# Altium PCB Inverter_Breakout.PcbDoc
Units mil, origin at the board's own origin, x right, y up, seen from the top; angles counter-clockwise.
Board outline 2198.03 x 1423.03 mil, 2 copper layers (Top Layer, Bottom Layer); 11 components, 11 nets, 32 pads, 65 vias.
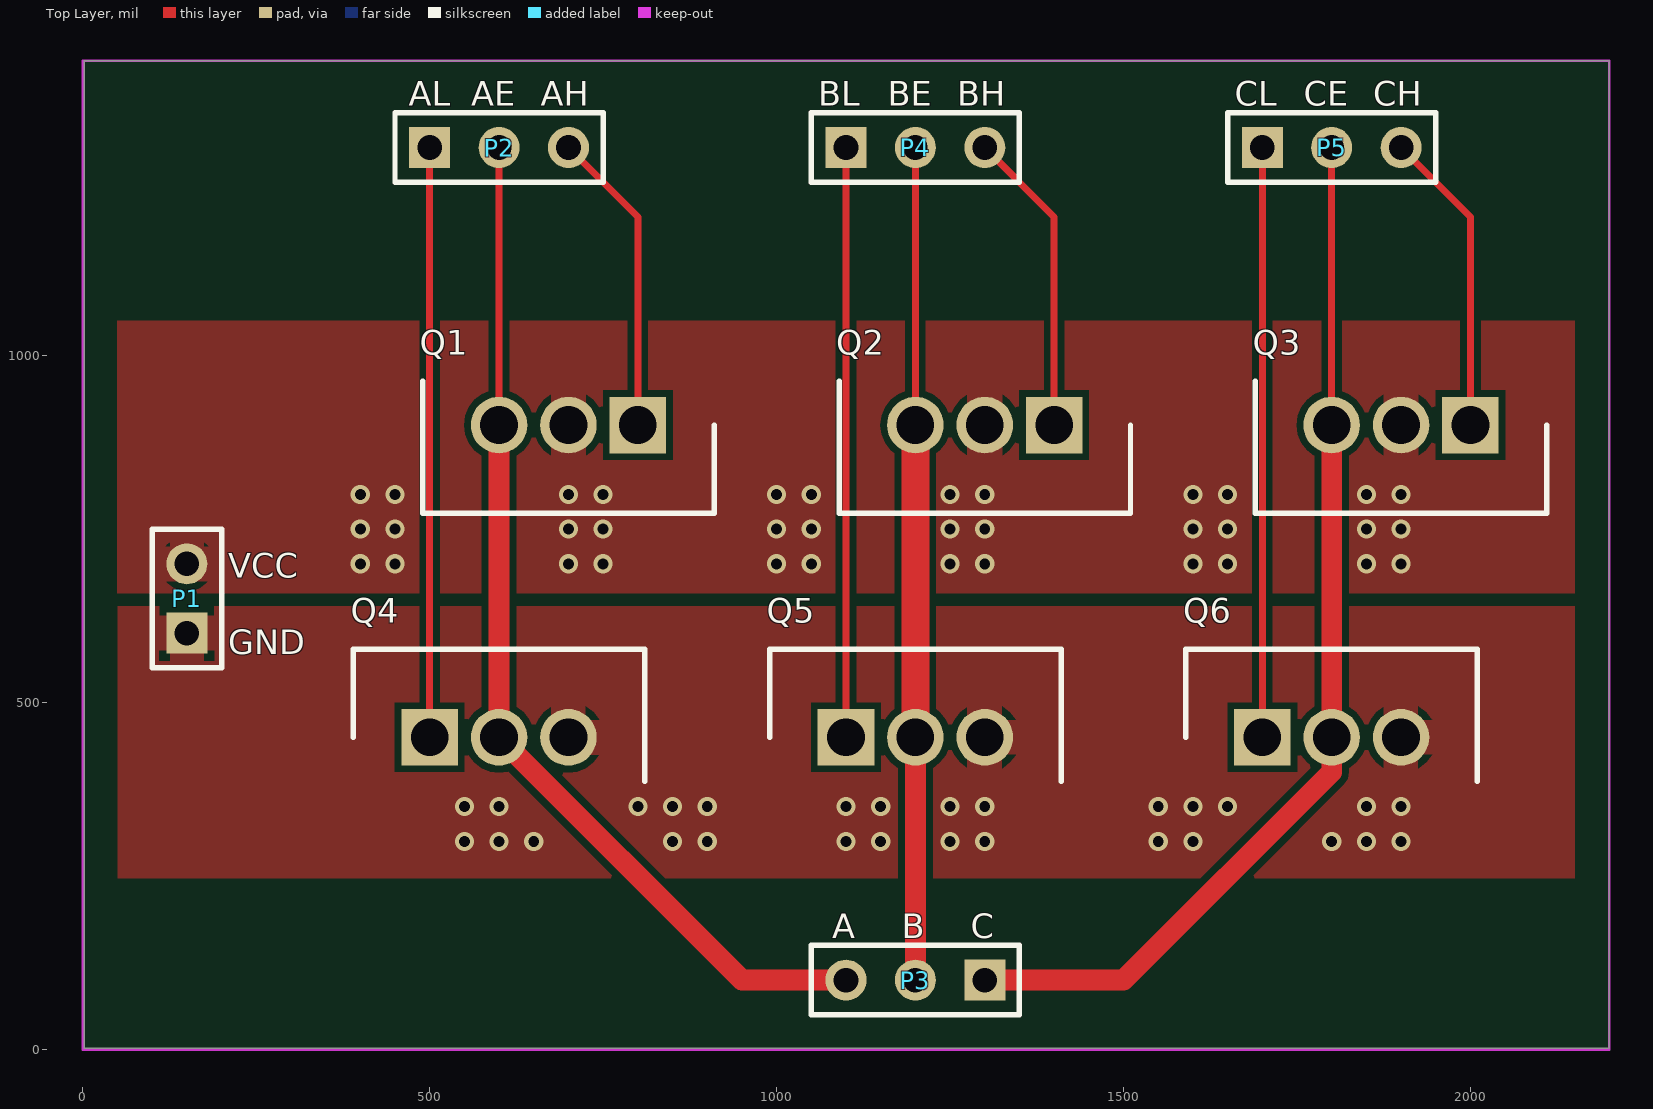
[diagram p0: Top Layer view]
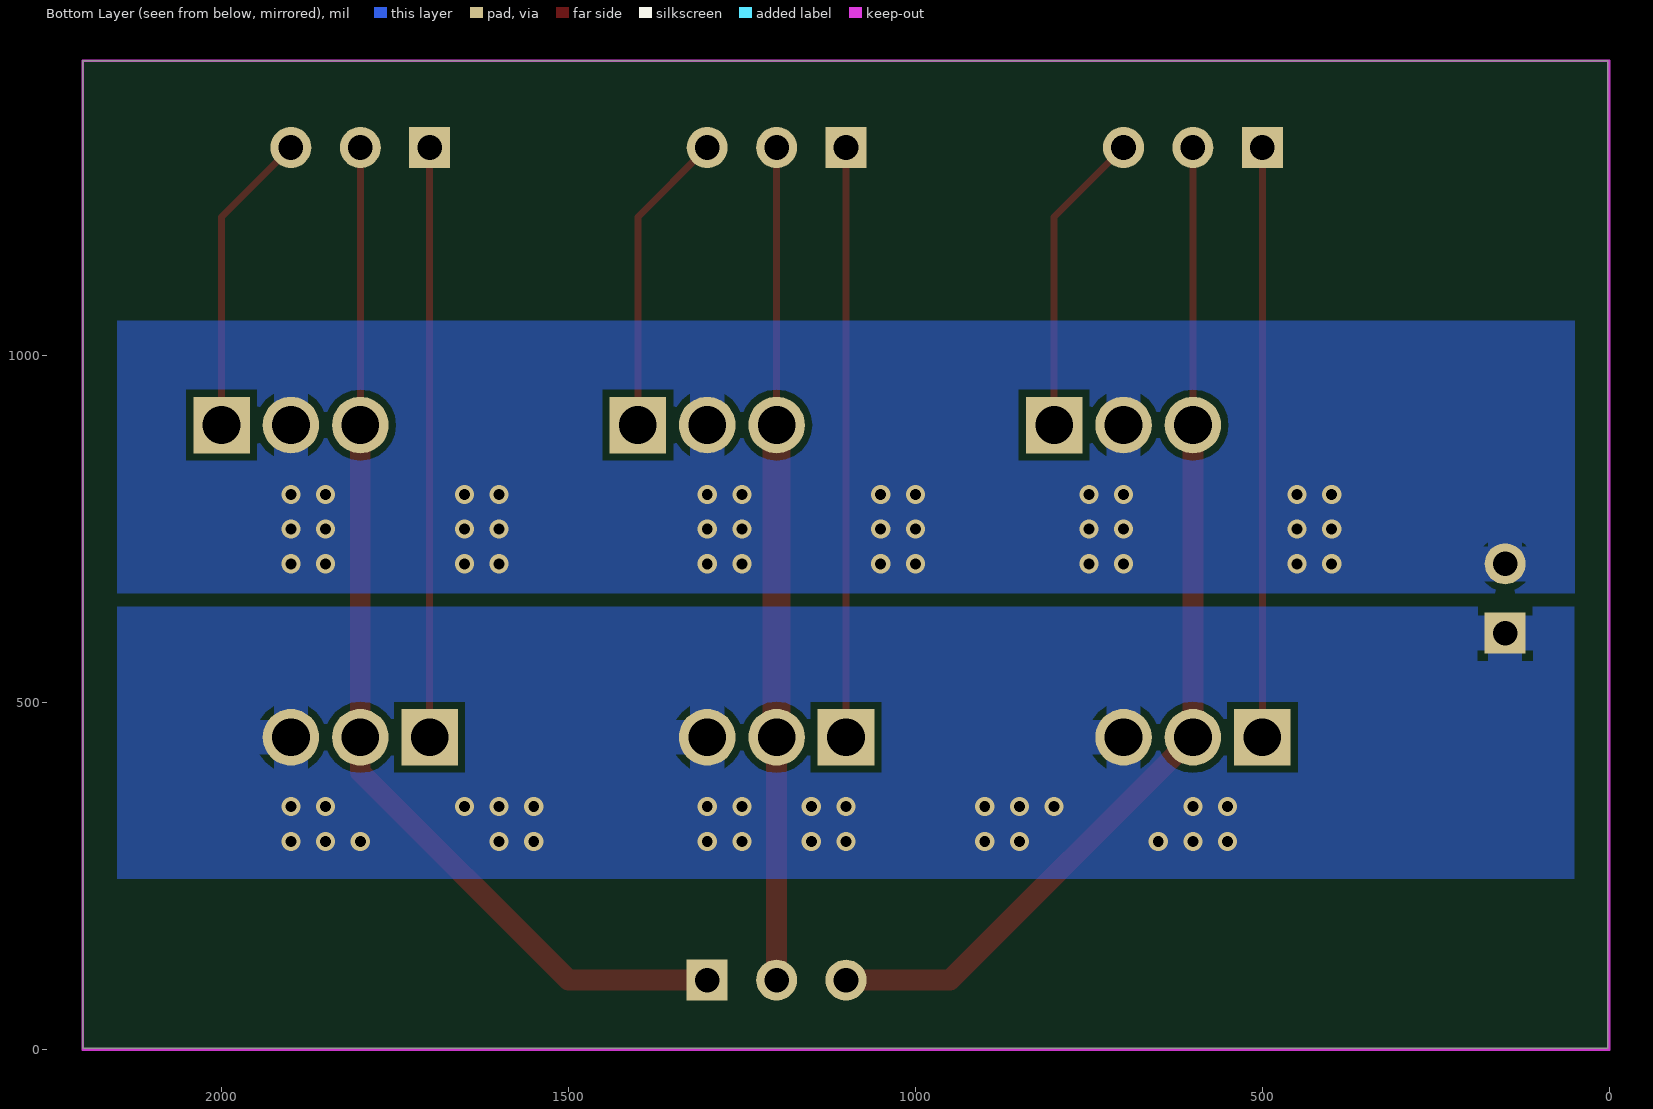
[diagram p1: Bottom Layer view, seen from below]
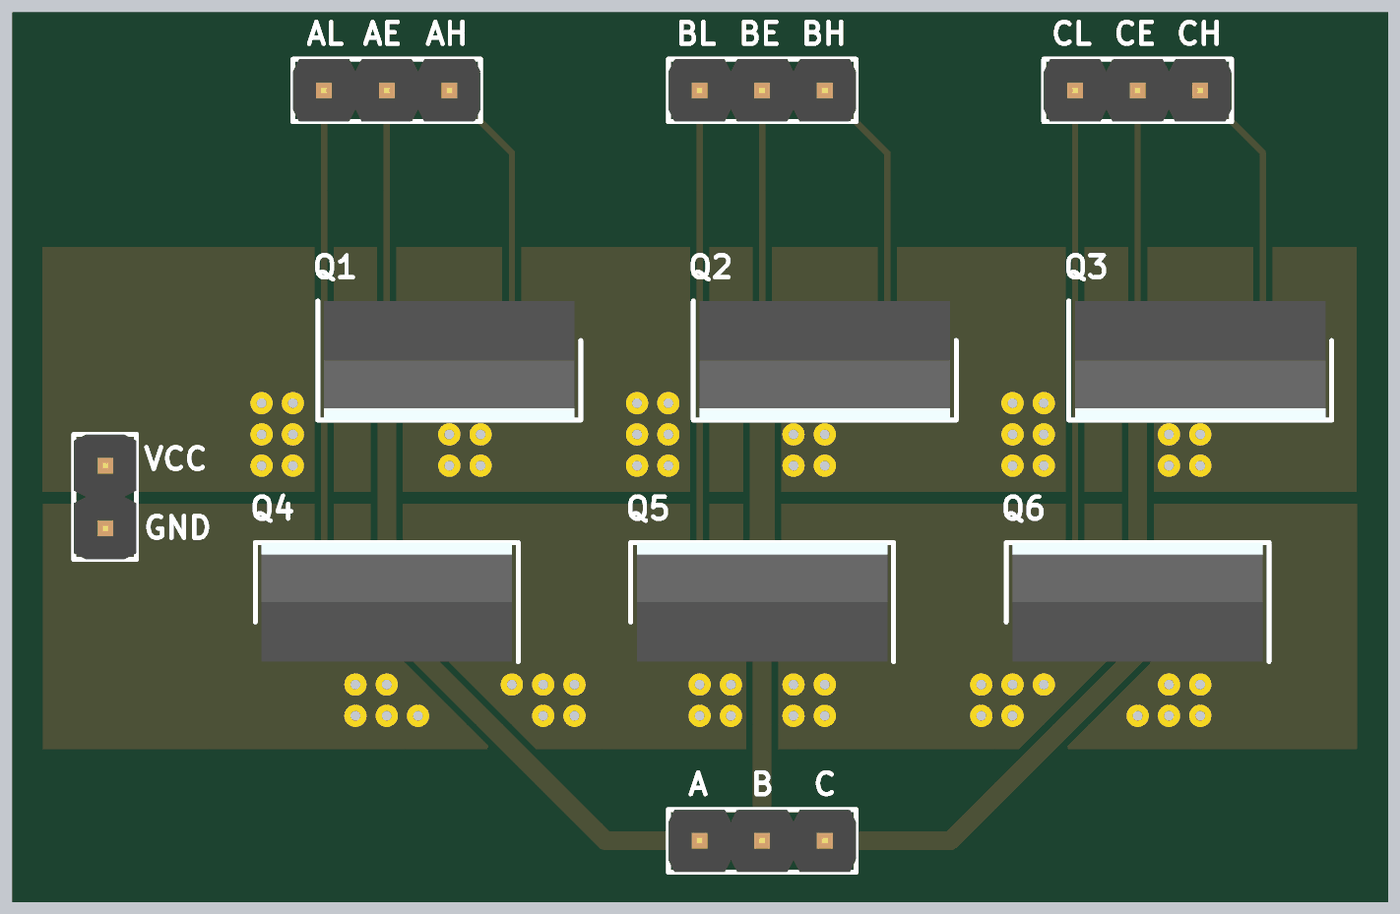
[diagram p2: 3D render of the assembled board from above, using the file's embedded part models]

## Layer stack, top to bottom
Top Solder: solder mask 0.4, Solder Resist, Dk 3.5
Top Layer: signal copper 1.4
Dielectric 1: dielectric 12.6, FR-4, Dk 4.8
Bottom Layer: signal copper 1.4
Bottom Solder: solder mask 0.4, Solder Resist, Dk 3.5

## Board outline
1.97,1.97 2200,1.97 2200,1425 1.97,1425

## Design rules (kind name [scope] priority, off if disabled: settings)
Clearance [All] p1: gap=10 ignorepadtopadclearanceinfootprint=FALSE except(0: Arc-Hole Track-Hole SMDPad-Hole THPad-Hole Via-Hole Fill-Hole Poly-Hole Region-Hole Text-Hole)
PolygonConnect [All] p1: connectstyle=Relief reliefconductorwidth=50 reliefentries=4 polygonreliefangle="90 Angle" airgapwidth=10
RoutingVias [All] p1: holewidth=236.22 width=236.22 viastyle="Through Hole" minholewidth=27.17 minwidth=35 maxholewidth=236.22 maxwidth=236.22
SolderMaskExpansion [All] p1: expansion=4 istentingtop=FALSE
Width [All] p1: maxlimit=50 minlimit=10 preferedwidth=10 minimp=50.000000 maximp=50.000000 favimp=50.000000
30 further rules are at their usual default settings.

## Components (designator, comment, footprint, x,y, rotation, side; value= is the part's Value field where it differs from the comment)
P1 "1x2 Header" HDR1X2 150,600 r90 top
P2 "1x3 Header" HDR1X3 500,1300 r0 top
P3 "1x3 Header" HDR1X3 1300,100 r180 top
P4 "1x3 Header" HDR1X3 1100,1300 r0 top
P5 "1x3 Header" HDR1X3 1700,1300 r0 top
Q1 "IRF2807STRLPBF" TO2520AB 800,900 r180 top
Q2 "IRF2807STRLPBF" TO2520AB 1400,900 r180 top
Q3 "IRF2807STRLPBF" TO2520AB 2000,900 r180 top
Q4 "IRF2807STRLPBF" TO2520AB 500,450 r0 top
Q5 "IRF2807STRLPBF" TO2520AB 1100,450 r0 top
Q6 "IRF2807STRLPBF" TO2520AB 1700,450 r0 top

## Footprints (in the part's own frame and the unit in brackets; to place one, negate y for a bottom-side part, rotate by r counter-clockwise, add the part's x,y. Pads: shape width x height; smd on the part's side, far side on the other; paste and mask are expansions set on the pad)
HDR1X2 [mm] "Connector; Header; 2 Position"
  rect 1.5x1.5 hole 0.9: 1(0,0)
  round 1.5 hole 0.9: 2(2.54,0)
  silkscreen extent -1.27,-1.27 3.81,1.27, body extent -1.27,-1.27 3.81,1.27, height 8.54
HDR1X3 [mm] "Connector; Header; 3 Position"
  rect 1.5x1.5 hole 0.9: 1(0,0)
  round 1.5 hole 0.9: 2(2.54,0) 3(5.08,0)
  silkscreen extent -1.27,-1.27 6.35,1.27, body extent -1.27,-1.27 6.35,1.27, height 8.54
TO2520AB [mm]
  rect 2.07x2.07 hole 1.38: 1(0,0)
  round 2.07 hole 1.38: 2(2.54,0) 3(5.08,0)
  silkscreen extent -2.8,-1.61 7.88,3.22, body extent -2.54,-1.61 7.62,3.22, height 18.86

## Part data
P1: "1x2 Pin Header"
P2 P3 P4 P5: "1x3 Pin Header"
Q1 Q2 Q3 Q4 Q5 Q6: library part MOSFET-N, Manufacturer=Infineon, Rating="75V 82A", Supplier Part Number=IRF2807STRLPBFCT-ND, Manufacturer Part Number=IRF2807STRLPBF, Supplier=Digikey

## Via types
v1: diameter 27.56, hole 15.75, Top Layer to Bottom Layer, 65 vias

## Nets (pads, with @x,y where several pads share a name; then routed paths per layer and width w, separated by ;. In a path a pad name is that pad's centre, name@x,y a point inside that pad or via, vN(x,y) a via of type N, cw(c..) or ccw(c..) an arc to the next point about the centre after c; other vN are vias at no path point)
GND: P1.1 Q4.3 Q5.3 Q6.3
  other v1: 550,300 600,300 650,300 850,300 900,300 1100,300 1150,300 1250,300 1300,300 1550,300 1600,300 1800,300 1850,300 1900,300 550,350 600,350 800,350 850,350 900,350 1100,350 1150,350 1250,350 1300,350 1550,350 1600,350 1650,350 1850,350 1900,350
HIGH_A: P2.3 Q1.1 | length 441.4
  Top Layer w10: P2.3 800,1200 Q1.1
HIGH_B: P4.3 Q2.1 | length 441.4
  Top Layer w10: P4.3 1400,1200 Q2.1
HIGH_C: P5.3 Q3.1 | length 441.4
  Top Layer w10: P5.3 2000,1200 Q3.1
LOW_A: P2.1 Q4.1 | length 850
  Top Layer w10: Q4.1 P2.1
LOW_B: P4.1 Q5.1 | length 850
  Top Layer w10: Q5.1 P4.1
LOW_C: P5.1 Q6.1 | length 850
  Top Layer w10: Q6.1 P5.1
PHASE_A: P2.2 P3.3 Q1.3 Q4.2 | length 1495
  Top Layer w10: Q1.3 P2.2
  Top Layer w30: Q1.3 Q4.2 950,100 P3.3
PHASE_B: P3.2 P4.2 Q2.3 Q5.2 | length 1200
  Top Layer w10: Q2.3 P4.2
  Top Layer w30: P3.2 Q5.2
  Top Layer w40: Q5.2 Q2.3
PHASE_C: P3.1 P5.2 Q3.3 Q6.2 | length 1524.3
  Top Layer w10: Q3.3 P5.2
  Top Layer w30: P3.1 1500,100 1800,400 Q6.2 Q3.3
VCC: P1.2 Q1.2 Q2.2 Q3.2
  other v1: 400,700 450,700 700,700 750,700 1000,700 1050,700 1250,700 1250,700 1300,700 1600,700 1650,700 1850,700 1900,700 400,750 450,750 700,750 750,750 1000,750 1050,750 1250,750 1300,750 1600,750 1650,750 1850,750 1900,750 400,800 450,800 700,800 750,800 1000,800 1050,800 1250,800 1300,800 1600,800 1650,800 1850,800 1900,800

## Polygon pours and split planes (outlines as drawn)
GND on Top Layer "NONET_L-01_P-001" (solid, pour order 2): 50.44,638.81 2150.44,638.81 2150.44,246.71 50.44,246.71
VCC on Top Layer "NONET_L-01_P-001" (solid, pour order 0): 50,1050 2150,1050 2150,657.9 50,657.9
VCC on Bottom Layer "NONET_L-01_P-001" (solid, pour order 1): 50,1050 2150,1050 2150,657.9 50,657.9
GND on Bottom Layer "NONET_L-01_P-001" (solid, pour order 3): 50.44,638.11 2150.44,638.11 2150.44,246.01 50.44,246.01

## Keep-outs
Keep-Out Layer:
  lines w3.94: 0,0 0,1425 2200,1425 2200,0 0,0

## Silkscreen, mask and mechanical layers (free items; w line width, h text height)
Top Overlay:
  text "AL" at 470,1360 h35
  text "AE" at 560,1360 h35
  text "AH" at 660,1360 h35
  text "BL" at 1060,1360 h35
  text "BE" at 1160,1360 h35
  text "BH" at 1260,1360 h35
  text "CL" at 1660,1360 h35
  text "CE" at 1760,1360 h35
  text "CH" at 1860,1360 h35
  text "VCC" at 210,680 h35
  text "GND" at 210,570 h35
  text "A" at 1080,160 h35
  text "B" at 1180,160 h35
  text "C" at 1280,160 h35